# Altium PCB E3-TP3.PcbDoc
Units mm, origin at the board's own origin, x right, y up, seen from the top; angles counter-clockwise.
Board outline 100 x 50 mm, 2 copper layers (Top Layer, Bottom Layer); 9 components, 14 nets, 66 pads, 4 vias.
Unrouted connection lines stored in the file: 5.
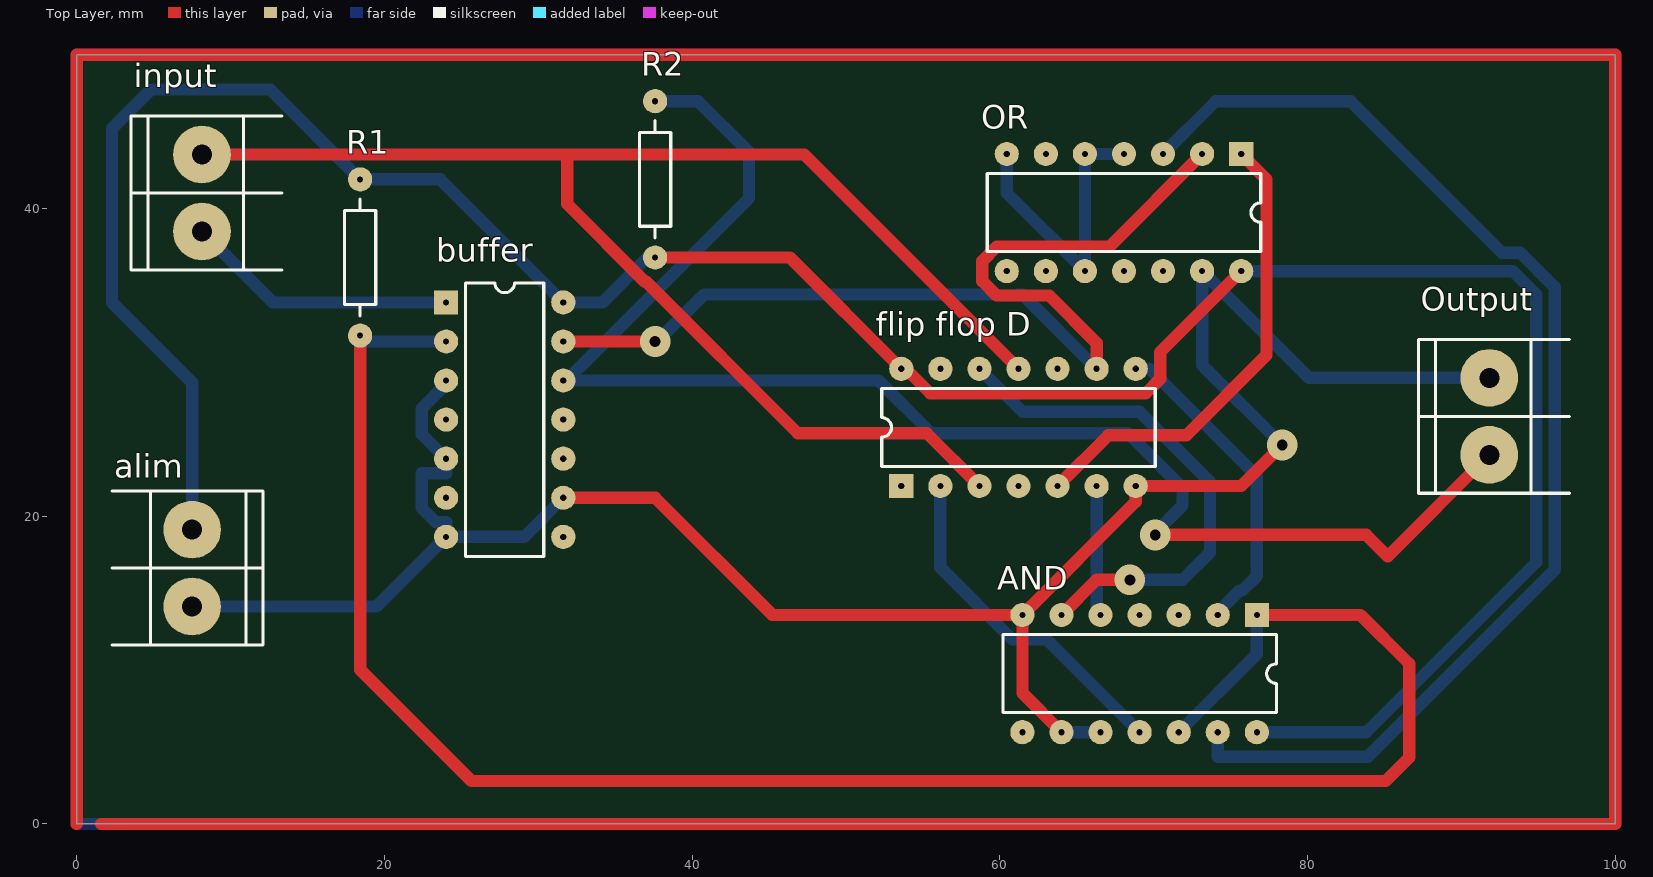
[diagram p0: Top Layer view]
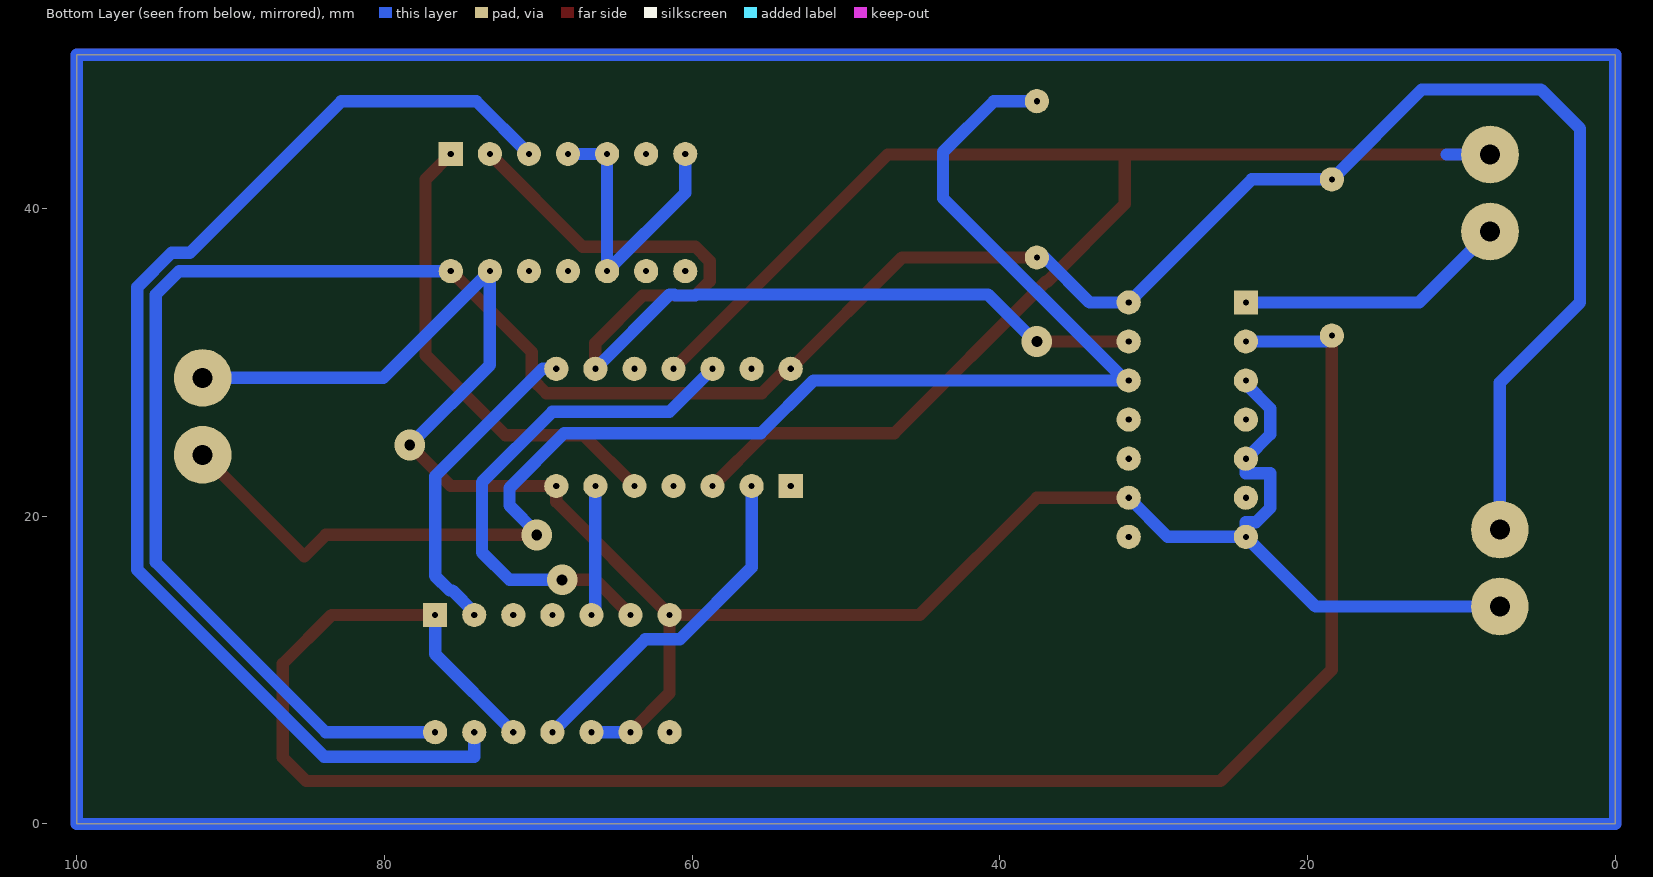
[diagram p1: Bottom Layer view, seen from below]
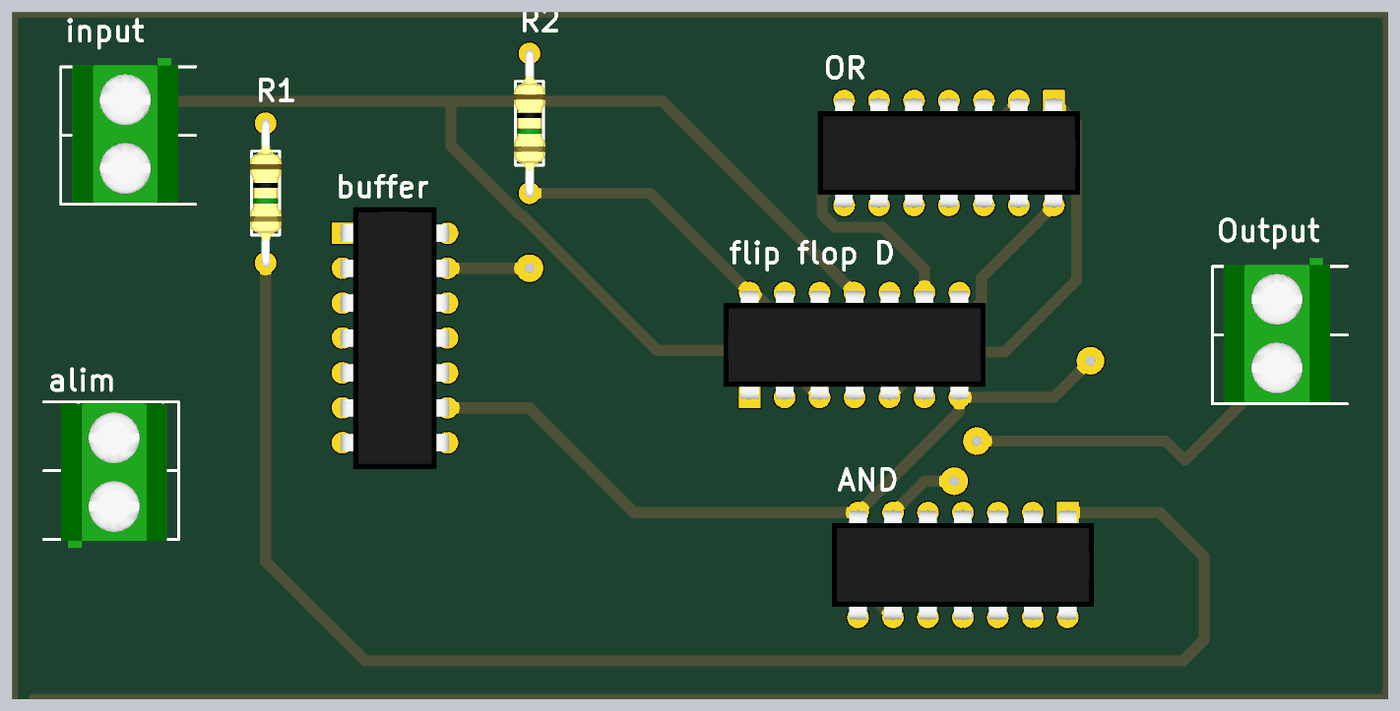
[diagram p2: 3D render of the assembled board from above, using the file's embedded part models]

## Layer stack, top to bottom
Top Solder: solder mask 0.0102, Solder Resist, Dk 3.5
Top Layer: signal copper 0.0356
Dielectric 1: dielectric 0.32, FR-4, Dk 4.8
Bottom Layer: signal copper 0.0356
Bottom Solder: solder mask 0.0102, Solder Resist, Dk 3.5

## Board outline
0,0 100,0 100,50 0,50

## Design rules (kind name [scope] priority, off if disabled: settings)
Clearance [All] p1: gap=0.4 ignorepadtopadclearanceinfootprint=FALSE except(0: Arc-Hole Track-Hole SMDPad-Hole THPad-Hole Via-Hole Fill-Hole Poly-Hole Region-Hole Text-Hole; 0.254: THPad-THPad THPad-Via THPad-Fill THPad-Poly THPad-Region THPad-Text Fill-Fill Fill-Poly Fill-Region Fill-Text Poly-Poly Poly-Region Poly-Text Region-Region Region-Text Text-Text)
PolygonConnect [All] p1: connectstyle=Relief reliefconductorwidth=0.254 reliefentries=4 polygonreliefangle="90 Angle" airgapwidth=0.254
RoutingVias [All] p1: holewidth=0.4 width=1.7 viastyle="Through Hole" minholewidth=0.711 minwidth=1.27 maxholewidth=0.5 maxwidth=2
SolderMaskExpansion [All] p1: expansion=0.102
Width [All] p1: maxlimit=0.8 minlimit=0.5 preferedwidth=0.8 minimp=50.000000 maximp=50.000000 favimp=50.000000
30 further rules are at their usual default settings.

## Classes and differential pairs
component class E3-TP3: alim AND "flip flop D" input OR Output R1 R2

## Components (designator, comment, footprint, x,y, rotation, side; value= is the part's Value field where it differs from the comment)
alim "BORNERA 2" BORNERA2 7.493,16.637 r180 top
AND "IC_DIP14" DIP14 76.708,13.589 r270 top
buffer "IC_DIP14" DIP14 24.003,33.909 r0 top
"flip flop D" "IC_DIP14" DIP14 53.594,21.971 r90 top
input "BORNERA 2" BORNERA2 8.128,41.021 r0 top
OR "IC_DIP14" DIP14 75.692,43.561 r270 top
Output "BORNERA 2" BORNERA2 91.821,26.503 r0 top
R1 "RES" RES400 18.415,41.91 r270 top
R2 "RES" RES400 37.592,46.99 r270 top

## Footprints (in the part's own frame and the unit in brackets; to place one, negate y for a bottom-side part, rotate by r counter-clockwise, add the part's x,y. Pads: shape width x height; smd on the part's side, far side on the other; paste and mask are expansions set on the pad)
BORNERA2 [mm] "Bornera con Tornillos 5mm separación"
  round 3.75 hole 1.3: 1(0,2.5) 2(0,-2.5)
  silkscreen extent -4.6,-5 5.2,5, body extent -3.76,-4.89 3.94,5.61, height 10
DIP14 [mm]
  rect 1.57x1.57 hole 0.4: 1(0,0)
  round 1.57 hole 0.4: 2(0,-2.54) 3(0,-5.08) 4(0,-7.62) 5(0,-10.16) 6(0,-12.7) 7(0,-15.24) 8(7.62,-15.24) 9(7.62,-12.7) 10(7.62,-10.16) 11(7.62,-7.62) 12(7.62,-5.08) 13(7.62,-2.54) 14(7.62,0)
  silkscreen extent 1.27,-16.51 6.35,1.27, body extent -0.13,-17.14 7.75,1.9, height 4.19
RES400 [mm]
  round 1.57 hole 0.4: 1(0,0) 2(10.16,0)
  silkscreen extent 1.27,-1.02 8.89,1.02, body extent -0.3,-1.14 10.46,1.17, height 2.43

## Via types
v1: diameter 2, hole 0.711, Top Layer to Bottom Layer, 4 vias

## Nets (pads, with @x,y where several pads share a name; then routed paths per layer and width w, separated by ;. In a path a pad name is that pad's centre, name@x,y a point inside that pad or via, vN(x,y) a via of type N, cw(c..) or ccw(c..) an arc to the next point about the centre after c; other vN are vias at no path point)
3.3v-in: AND.1 AND.12 buffer.2 R1.2 | length 126.3
  Top Layer w0.8: R1.2 18.415,10.033 25.654,2.794 85.09,2.794 86.614,4.318 86.614,10.414 83.439,13.589 AND.1
  Bottom Layer w0.8: R1.2 18.796,31.369 buffer.2 ; AND.12 76.708,11.049 AND.1
"5v out": buffer.12 Output.2 R2.1 | length 99.2
  Top Layer w0.8: v1(70.104,18.796) 83.82,18.796 85.217,17.399 Output.2
  Bottom Layer w0.8: buffer.12 buffer.12@31.836,28.829 ; R2.1 40.386,46.99 43.688,43.688 43.688,40.681 buffer.12@31.836,28.829 ; v1(70.104,18.796) 70.104,18.923 71.882,20.701 71.882,21.844 68.326,25.4 55.54,25.4 52.111,28.829 buffer.12@31.836,28.829
clk: "flip flop D.3" "flip flop D.11" input.1 | length 99.3
  Top Layer w0.8: input.1 31.877,43.521 ; 58.674,21.971 55.245,25.4 46.863,25.4 37.02,35.243 36.934,35.243 31.877,40.3 31.877,43.521 ; 61.214,29.591 47.284,43.521 31.877,43.521
  Bottom Layer w0.8: input.1 10.962,43.521
GND: "flip flop D.7" alim.1 AND.7 AND.9 AND.10 buffer.3 buffer.5 buffer.7 buffer.9 buffer.11 OR.4 OR.5 OR.7 OR.9 OR.10 OR.12 OR.13 Output.1 | length 162.3
  Top Layer w0.8: buffer.9 37.592,21.209 45.212,13.589 AND.7 ; AND.9 61.468,8.509 AND.7 ; v1(78.359,24.638) 75.692,21.971 68.834,21.971 68.834,20.955 AND.7
  Bottom Layer w0.8: alim.1 19.471,14.137 buffer.7 ; buffer.3 24.003,28.597 22.416,27.01 22.416,25.336 buffer.5 24.003,22.796 22.416,22.796 22.416,20.551 23.345,19.622 24.003,19.622 buffer.7 ; buffer.9 29.083,18.669 buffer.7 ; OR.7 60.452,41.021 OR.10 OR.5 OR.4 ; AND.9 AND.10 ; v1(78.359,24.638) 73.152,29.845 OR.13 80.09,29.003 Output.1
inp: buffer.1 input.2 | length 17.8
  Bottom Layer w0.8: input.2 12.74,33.909 buffer.1
NetAND_3: AND.3 AND.4
"NOT x": "flip flop D.6" AND.5 | length 8.5
  Bottom Layer w0.8: 66.294,21.971 66.294,13.843 AND.5
"NOT y": "flip flop D.8" AND.2 | length 20.9
  Bottom Layer w0.8: 68.834,29.591 69.723,29.591 76.708,22.606 76.708,16.129 75.755,15.176 75.589,15.176 74.168,13.755 AND.2
or: AND.13 OR.3 | length 78.8
  Bottom Layer w0.8: OR.3 74.041,46.99 82.804,46.99 92.653,37.141 93.842,37.141 96.069,34.914 96.069,16.521 83.93,4.382 74.168,4.382 AND.13
Vcc: "flip flop D.14" alim.2 AND.14 buffer.14 OR.14 R1.1 R2.2 | length 177.5
  Top Layer w0.8: R2.2 46.355,36.83 53.594,29.591 53.889,29.591 55.476,28.004 69.492,28.004 70.421,28.933 70.421,30.67 OR.14
  Bottom Layer w0.8: alim.2 7.493,28.702 2.286,33.909 2.286,45.212 4.826,47.752 12.573,47.752 R1.1 23.622,41.91 buffer.14 34.163,33.909 37.084,36.83 R2.2 ; OR.14 93.345,35.941 94.869,34.417 94.869,17.018 83.82,5.969 AND.14
x: "flip flop D.5" OR.1 | length 30.9
  Top Layer w0.8: 63.754,21.971 67.056,25.273 72.136,25.273 77.343,30.48 77.343,41.91 OR.1
X-futuro: "flip flop D.2" AND.11 | length 22.7
  Bottom Layer w0.8: 56.134,21.971 56.134,16.678 60.81,12.002 63.055,12.002 AND.11
y: "flip flop D.9" buffer.13 OR.2 | length 67.3
  Top Layer w0.8: buffer.13 v1(37.592,31.369) ; 66.294,29.591 66.294,31.27 63.211,34.354 59.794,34.354 58.865,35.283 58.865,36.599 59.794,37.528 67.119,37.528 OR.2
  Bottom Layer w0.8: v1@37.592,31.242 40.767,34.417 59.731,34.417 59.794,34.354 61.11,34.354 61.173,34.417 61.468,34.417 66.294,29.591
Y-futuro: "flip flop D.12" AND.6 | length 33.9
  Top Layer w0.8: AND.6 66.294,15.875 v1(68.453,15.875)
  Bottom Layer w0.8: 58.674,29.591 61.468,26.797 69.088,26.797 73.66,22.225 73.66,17.653 71.882,15.875 v1(68.453,15.875)
pads on no net: "flip flop D.1" "flip flop D.4" "flip flop D.10" "flip flop D.13" AND.8 buffer.4 buffer.6 buffer.8 buffer.10 OR.6 OR.8 OR.11
copper on no net: | length 598.4
  Top Layer w0.8: 0,0 0,50 100,50 100,0 1.581,0
  Bottom Layer w0.8: 0,0 0,50 100,50 100,0 0,0